# Altium PCB Therm_Expand_PCB.PcbDoc (part 2 of 2)
Units mm, origin at the board's own origin, x right, y up, seen from the top; angles counter-clockwise.
Board outline 84.45 x 65.96 mm, 2 copper layers (Top Layer, Bottom Layer); 40 components, 59 nets, 217 pads, 138 vias.
Unrouted connection lines stored in the file: 1.
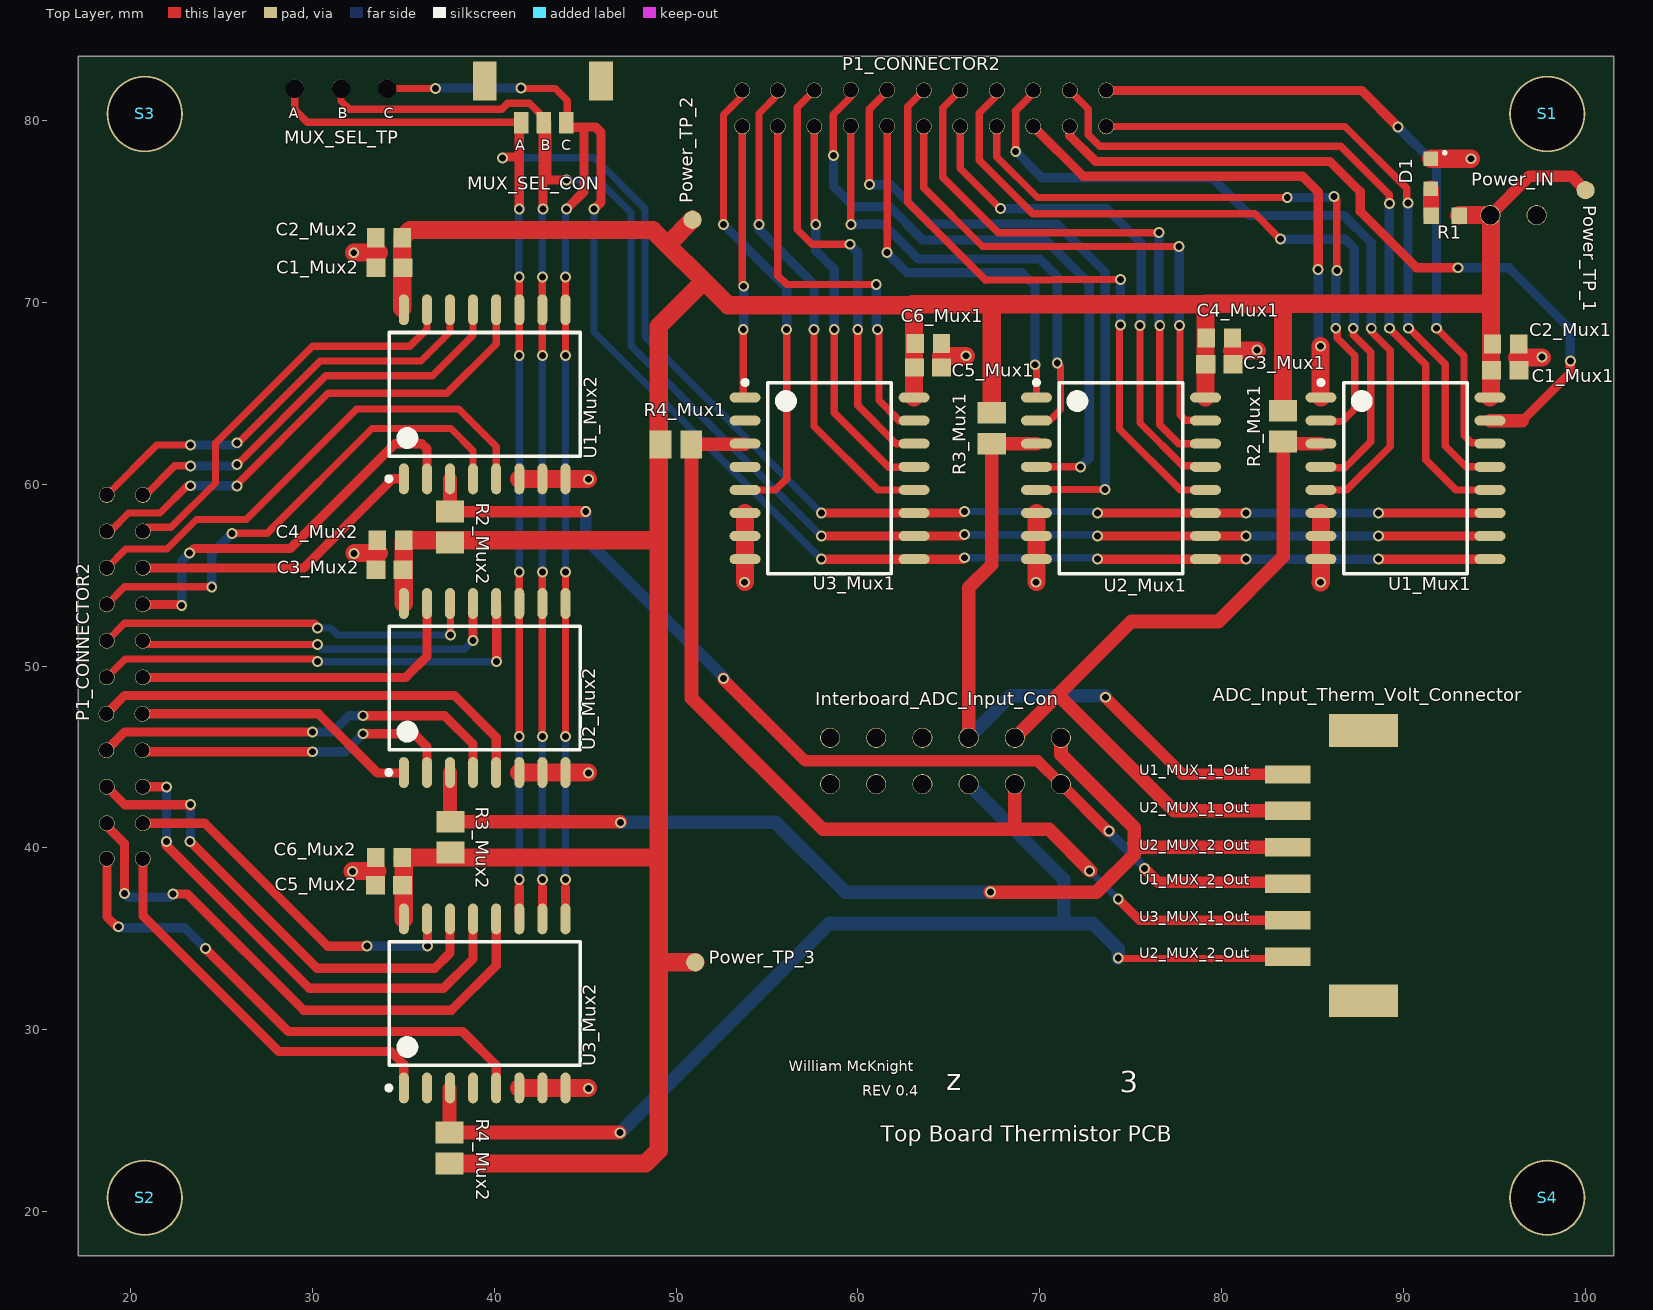
[diagram p0: Top Layer view]

## Via types
v1: diameter 0.6, hole 0.381, Top Layer to Bottom Layer, tented top, 138 vias

## Nets (pads, with @x,y where several pads share a name; then routed paths per layer and width w, separated by ;. In a path a pad name is that pad's centre, name@x,y a point inside that pad or via, vN(x,y) a via of type N, cw(c..) or ccw(c..) an arc to the next point about the centre after c; other vN are vias at no path point) (continued)
TS_IN20_U_AHK50H-ND_THERM_CONNECTOR1: (continued)
  Top Layer w0.4: v1(54.559,74.295) 54.559,80.391 55.601,81.432 P1_CONNECTOR2.20@55.601,81.661 ; v1(57.582,68.504) 57.582,63.195 61.087,59.69 U3_Mux1.12
  Bottom Layer w0.508: v1(54.559,74.295) 54.559,74.016 57.582,70.993 v1(57.582,68.504)
TS_IN20_U_AHK50H-ND_THERM_CONNECTOR2: P1_CONNECTOR2.20@18.694,41.351 U3_Mux2.12 | length 31.1
  Top Layer w0.508: P1_CONNECTOR2.20@18.694,41.351 18.694,41.199 19.66,40.234 v1(19.66,37.49) ; v1(22.327,37.465) 23.114,37.465 29.515,31.064 37.643,31.064 40.107,33.528 U3_Mux2.12
  Bottom Layer w0.508: v1(19.66,37.49) 19.863,37.287 22.149,37.287 v1(22.327,37.465)
TS_IN21_U_AHK50H-ND_THERM_CONNECTOR1: P1_CONNECTOR2.21@53.645,79.68 U3_Mux1.1 | length 14.7
  Top Layer w0.4: P1_CONNECTOR2.21@53.645,79.68 53.645,70.968 v1(53.721,70.891) ; v1@53.696,68.25 53.696,64.87 U3_Mux1.1
  Bottom Layer w0.508: v1(53.696,68.504) 53.721,68.529 v1(53.721,70.891)
TS_IN21_U_AHK50H-ND_THERM_CONNECTOR2: P1_CONNECTOR2.21@20.676,39.395 U3_Mux2.1 | length 22.2
  Top Layer w0.508: P1_CONNECTOR2.21@20.676,39.395 20.676,36.271 28.143,28.804 34.315,28.804 35.027,28.092 U3_Mux2.1
TS_IN22_U_AHK50H-ND_THERM_CONNECTOR1: P1_CONNECTOR2.22@53.645,81.661 U3_Mux1.5 | length 25.5
  Top Layer w0.4: v1(52.603,74.295) 52.603,80.315 53.645,81.356 P1_CONNECTOR2.22@53.645,81.661 ; U3_Mux1.5 55.474,59.69 56.083,60.3 56.083,68.199
  Bottom Layer w0.508: v1(52.603,74.295) 53.924,72.974 53.899,72.974 56.083,70.79 v1(56.083,68.504)
TS_IN22_U_AHK50H-ND_THERM_CONNECTOR2: P1_CONNECTOR2.22@18.694,39.395 U3_Mux2.5 | length 29.1
  Top Layer w0.508: P1_CONNECTOR2.22@18.694,39.395 18.694,36.22 19.253,35.662 v1(19.329,35.662) ; v1(24.117,34.455) 28.677,29.896 38.252,29.896 40.107,28.042 U3_Mux2.5
  Bottom Layer w0.508: v1@19.393,35.611 22.962,35.611 v1(24.117,34.455)
pads on no net: ADC_Input_Therm_Volt_Connector.7 ADC_Input_Therm_Volt_Connector.8 Interboard_ADC_Input_Con.1 Interboard_ADC_Input_Con.2 Interboard_ADC_Input_Con.3 Interboard_ADC_Input_Con.4 Interboard_ADC_Input_Con.5 Interboard_ADC_Input_Con.6 MUX_SEL_CON.4 MUX_SEL_CON.5 U3_Mux1.2 U3_Mux1.4 U3_Mux2.2 U3_Mux2.4

## Polygon pours and split planes (outlines as drawn)
no net on Bottom Layer "NONET_L02_P002" (solid, remove dead copper, pour order 2): 17.12,83.541 101.575,83.541 101.575,17.577 17.12,17.577
AGND on Bottom Layer "AGND" (solid, remove dead copper, pour order 0): 101.575,83.541 17.12,83.541 17.12,17.577 101.575,17.577 101.575,26.086

## Silkscreen, mask and mechanical layers (free items; w line width, h text height)
Top Overlay:
  text "A" at 28.702,79.928 h1
  text "B" at 31.394,79.934 h1
  text "C" at 33.909,79.934 h1
  text "A" at 41.148,78.175 h1
  text "B" at 42.545,78.181 h1
  text "C" at 43.688,78.181 h1
  text "U1_MUX_1_Out" at 75.489,43.79 h1
  text "U2_MUX_1_Out" at 75.489,41.753 h1
  text "U2_MUX_2_Out" at 75.489,39.665 h1
  text "U1_MUX_2_Out" at 75.489,37.78 h1
  text "U3_MUX_1_Out" at 75.489,35.743 h1
  text "U2_MUX_2_Out" at 75.489,33.731 h1
  text "William McKnight" at 56.185,27.508 h1
  text "z" at 64.872,26.289 h2
  text "REV 0.4" at 60.253,26.162 h1
  text "3" at 74.397,26.162 h2
  text "Top Board Thermistor PCB" at 61.265,23.546 h1.5
Board Outline:
  the board outline again, w0.012